# Altium PCB ssd1963.PcbDoc
Units mm, origin at the board's own origin, x right, y up, seen from the top; angles counter-clockwise.
Board outline 75.65 x 56.28 mm, 2 copper layers (Top Layer, Bottom Layer); 41 components, 75 nets, 308 pads, 215 vias.
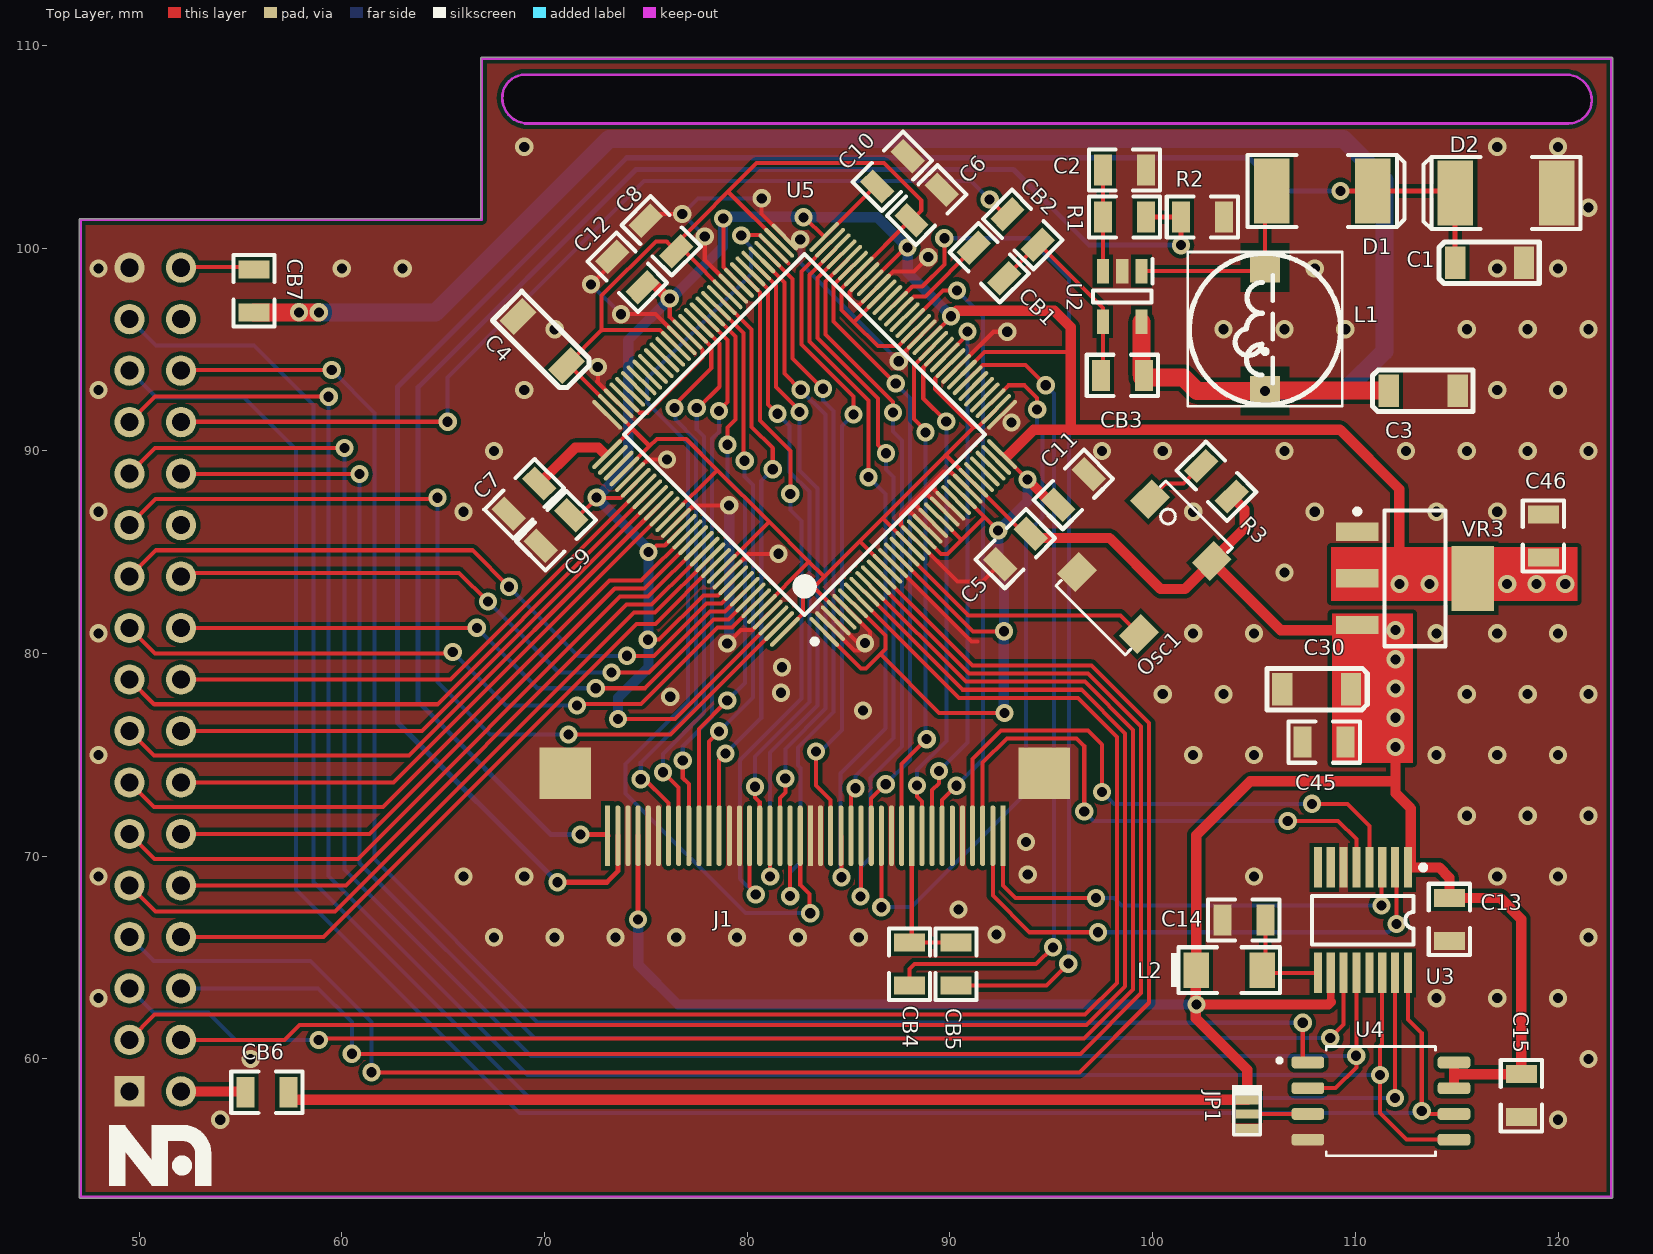
[diagram p0: Top Layer view]
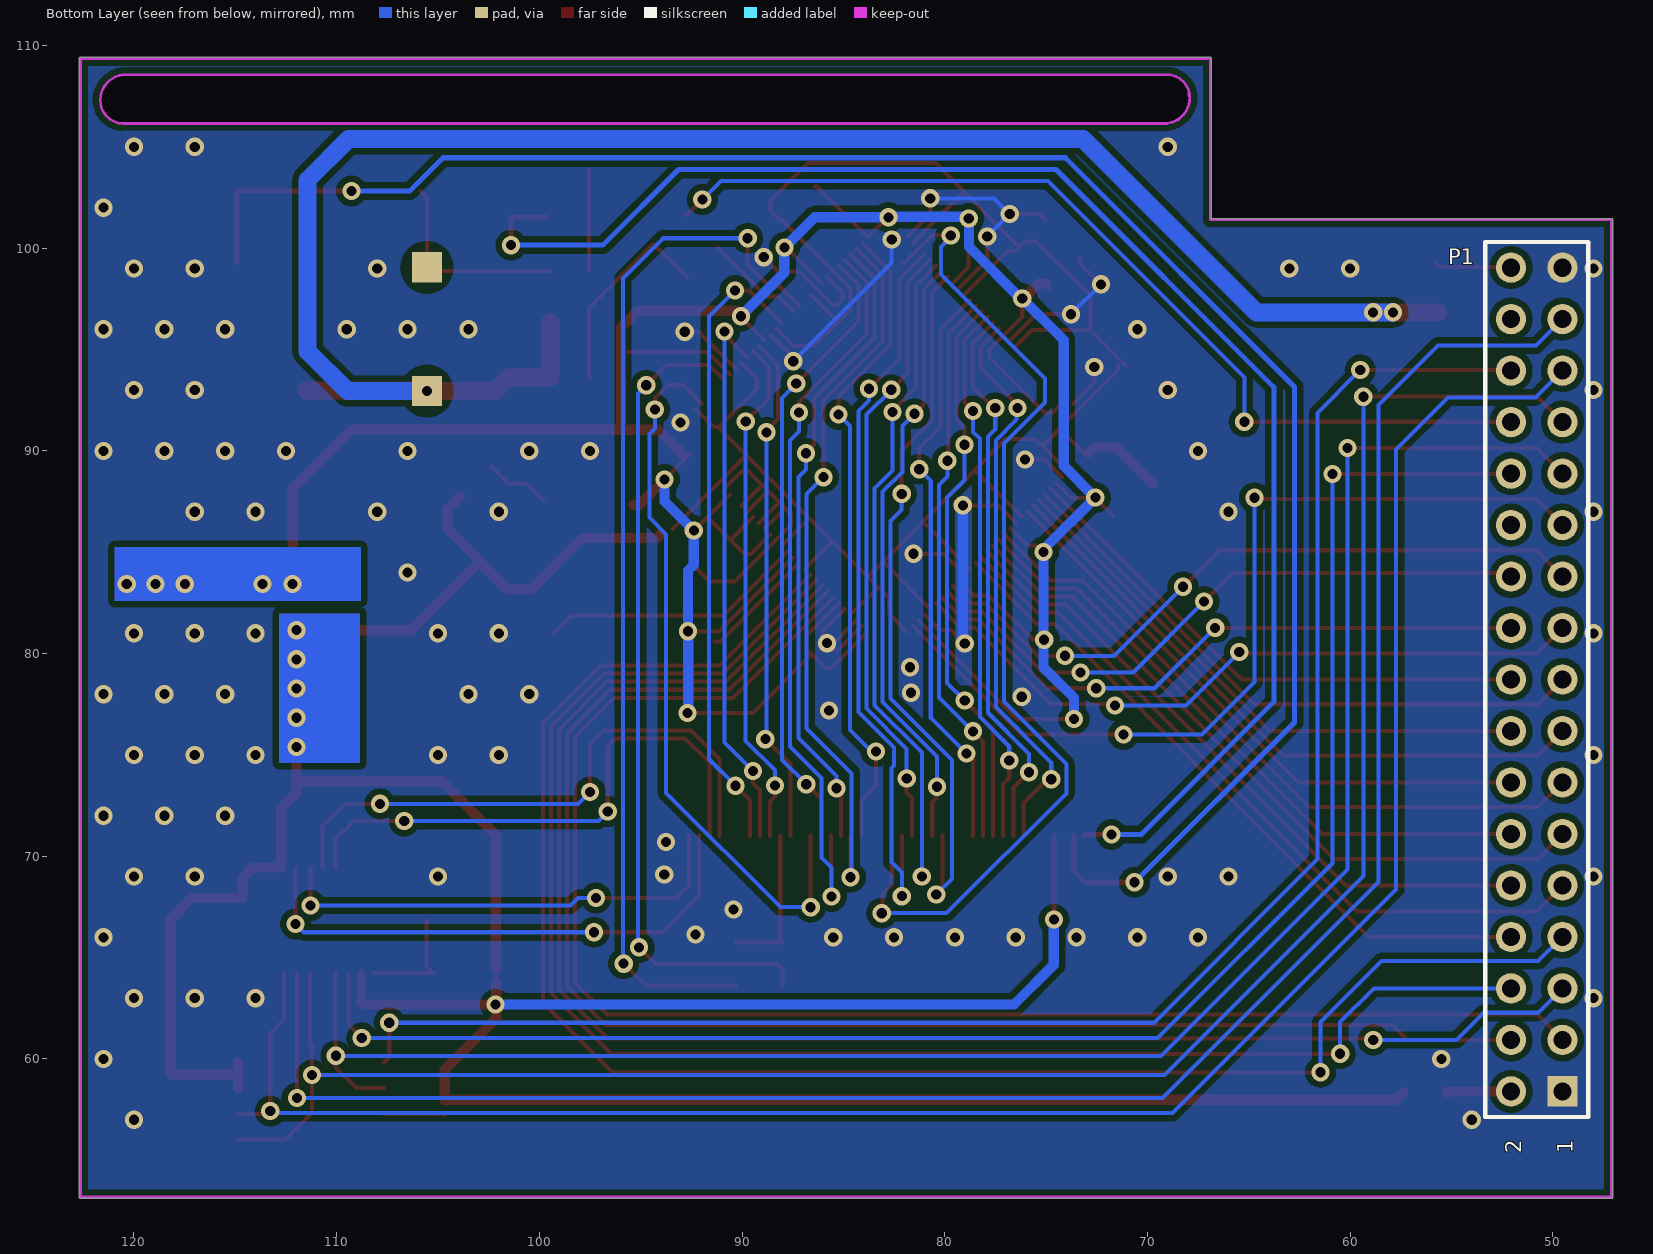
[diagram p1: Bottom Layer view, seen from below]
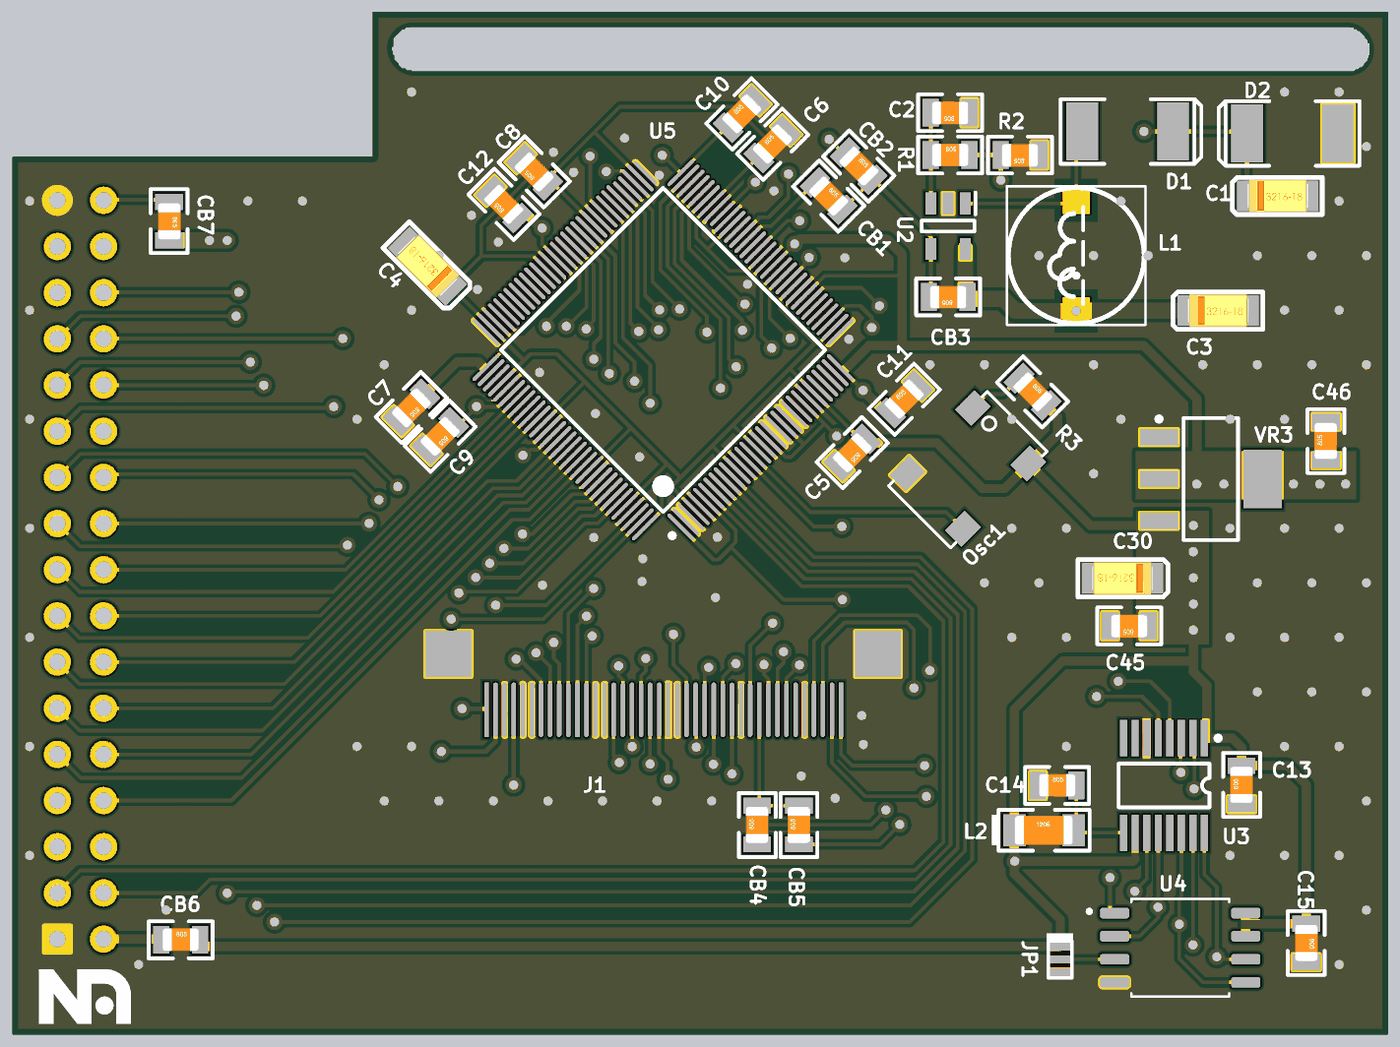
[diagram p2: 3D render of the assembled board from above, using the file's embedded part models]

## Layer stack, top to bottom
Top Solder: solder mask 0.0102, Solder Resist, Dk 3.5
Top Layer: signal copper 0.0356
Dielectric1: dielectric 0.32, FR-4, Dk 4.8
Bottom Layer: signal copper 0.0356
Bottom Solder: solder mask 0.0102, Solder Resist, Dk 3.5

## Board outline
47.116,53.136 cw(c47.111,53.199) 47.047,53.199 47.047,101.401 cw(c47.111,101.401) 47.124,101.464 cw(c47.136,101.401) 47.136,101.465 66.848,101.465 66.848,109.35 cw(c66.912,109.35) 66.848,109.352 cw(c66.912,109.354) 66.912,109.418 122.633,109.418 cw(c122.633,109.354) 122.697,109.354 122.697,53.199 cw(c122.633,53.199) 122.633,53.136 47.121,53.136 cw(c47.121,53.199)
cut-out: 67.946,107.455 67.998,107.506 67.998,107.934 68.237,108.173 68.237,108.208 68.271,108.208 68.494,108.43 68.584,108.43 68.699,108.544 68.879,108.544 68.901,108.566 120.553,108.566 120.568,108.551 120.742,108.551 120.836,108.457 120.946,108.457 121.032,108.37 121.097,108.37 121.25,108.217 121.272,108.217 121.272,108.203 121.424,108.05 121.424,107.999 121.562,107.862 121.562,107.709 121.642,107.629 121.642,107.528 121.685,107.484 121.678,107.477 121.678,107.179 121.671,107.172 121.671,107.049 121.62,106.998 121.62,106.889 121.569,106.838 121.569,106.766 121.489,106.686 121.489,106.664 121.381,106.555 121.381,106.519 121.228,106.367 121.141,106.367 121.025,106.251 120.916,106.251 120.807,106.142 120.619,106.142 120.611,106.134 120.604,106.142 69.031,106.142 68.972,106.201 68.718,106.201 68.623,106.296 68.484,106.296 68.293,106.488 68.283,106.488 68.283,106.562 68.038,106.806 68.038,106.998 67.964,107.072 67.964,107.232 67.911,107.285 67.911,107.508

## Design rules (kind name [scope] priority, off if disabled: settings)
Clearance [All] p1: gap=0.196 ignorepadtopadclearanceinfootprint=FALSE except(0: Arc-Hole Track-Hole SMDPad-Hole THPad-Hole Via-Hole Fill-Hole Poly-Hole Region-Hole Text-Hole)
ComponentClearance [All] p1: gap=0 collisioncheckmode=3 verticalgap=0 showdistances=FALSE
PolygonConnect [All] p1: connectstyle=Direct reliefconductorwidth=0.254 reliefentries=4 polygonreliefangle="90 Angle" airgapwidth=0.254
RoutingVias [All] p1: holewidth=0.5 width=0.9 viastyle="Through Hole" minholewidth=0.5 minwidth=0.9 maxholewidth=0.5 maxwidth=0.9
SolderMaskExpansion [All] p1: expansion=0.102 istentingtop=FALSE
Width [All] p1: maxlimit=100 minlimit=0.2 preferedwidth=0.2 minimp=50.000000 maximp=50.000000 favimp=50.000000
29 further rules are at their usual default settings.

## Components (designator, comment, footprint, x,y, rotation, side; value= is the part's Value field where it differs from the comment)
C1 "10uF/50V" "Tantalium Size A" 116.625,99.283 r0 top
C2 "200pF" 0805 98.611,103.86 r180 top
C3 "10uF" "Tantalium Size A" 113.353,92.972 r0 top
C4 "10uF" "Tantalium Size A" 69.884,95.42 r135 top
C5 "100nF" 0805 93.229,85.166 r225 top
C6 "100nF" 0805 88.855,102.129 r45 top
C7 "100nF" 0805 68.99,87.643 r225 top
C8 "100nF" 0805 75.75,100.608 r135 top
C9 "10nF" 0805 70.566,86.066 r225 top
C10 "10nF" 0805 87.161,103.794 r45 top
C11 "10nF" 0805 96.091,88.098 r45 top
C12 "10nF" 0805 74.082,98.82 r135 top
C13 "100nF" 0805 114.64,66.884 r90 top
C14 "100nF" 0805 104.498,66.854 r0 top
C15 "100nF" 0805 118.188,58.191 r270 top
C30 "10uF" "Tantalium Size A" 108.089,78.247 r180 top
C45 "100nF" 0805 108.463,75.629 r180 top
C46 "100nF" 0805 119.277,85.801 r90 top
CB1 "JUMPER" 0805 91.933,99.275 r315 top
CB2 "JUMPER" 0805 93.588,100.923 r315 top
CB3 "JUMPER" 0805 98.506,93.726 r180 top
CB4 "JUMPER" 0805 88.007,64.676 r90 top
CB5 "JUMPER" 0805 90.299,64.676 r90 top
CB6 "JUMPER" 0805 56.305,58.358 r0 top
CB7 "JUMPER" 0805 55.67,97.896 r270 top
D1 "SS14" 1N4004SMD 108.368,102.825 r270 top
D2 "ZENER 28V" 1N4004SMD 117.435,102.722 r90 top
J1 "CL586-0527-7" FPC_40PIN 92.616,71.015 r180 top locked (schematic designator LCD1)
JP1 "Jumper" JT3 104.669,57.307 r270 top
L1 "10uH 500mA" "INDUCT100UH B" 105.621,96.228 r270 top
L2 "100mh" 1206 103.775,64.389 r0 top
Osc1 "OSILATOR" XTAL_5X7 99.862,87.618 r315 top
P1 "LCD" HDR2X17 49.524,58.401 r90 bottom locked
R1 "1K" 0805 98.611,101.534 r0 top
R2 "80" 0805 102.456,101.534 r180 top
R3 "10K" 0805 103.148,88.503 r315 top
U2 "TPS61040" TPS61040 98.478,97.647 r270 top
U3 "ADS7843E" DBQ016 110.372,66.85 r180 top
U4 "W25Q16JVSSIQ" SOIC127P790X216-8N 111.263,57.925 r0 top
U5 "SSD1963" TSQFP40P1600X1600-128N 82.349,90.241 r135 top locked
VR3 "ASM1117(1.2)" ASM1117 112.945,83.711 r270 top

## Footprints (in the part's own frame and the unit in brackets; to place one, negate y for a bottom-side part, rotate by r counter-clockwise, add the part's x,y. Pads: shape width x height; smd on the part's side, far side on the other; paste and mask are expansions set on the pad)
1N4004SMD [mm]
  rect 3.2x1.75 smd mask+0.102: 1(0,-2.5) 2(0,2.5)
  silkscreen extent -1.78,-3.68 1.78,4.06, body extent -1.57,-2.57 1.54,2.73, height 1.2
0805 [mil]
  rect 35x60 smd mask+4: 1(-41.75,0) 2(41.75,0)
  silkscreen extent -69,-40 69,40, body extent -39,-24 40,25, height 31
1206 [mm]
  rect 1.25x1.75 smd mask+0.102: 1(-1.625,0) 2(1.625,0)
  silkscreen extent -2.87,-1.13 2.5,1.12, body extent -1.62,-0.79 1.58,0.81, height 0.98
ASM1117 [mm]
  rect 0.9x2.1 smd: 1(-2.3,-2.85) 2(0,-2.85) 3(2.3,-2.85)
  rect 3.2x2.1 smd: 4(0,2.85)
  silkscreen extent -3.42,-2.97 3.35,1.5
DBQ016 [mm] "SSOP; 16 Leads; Body Width 3.9 mm; Pitch 0.635 mm"
  rect 0.4x2 smd: 1(-2.222,-2.6) 2(-1.587,-2.6) 3(-0.952,-2.6) 4(-0.317,-2.6) 5(0.318,-2.6) 6(0.953,-2.6) 7(1.588,-2.6) 8(2.223,-2.6) 9(2.222,2.6) 10(1.587,2.6) 11(0.952,2.6) 12(0.317,2.6) 13(-0.318,2.6) 14(-0.953,2.6) 15(-1.588,2.6) 16(-2.223,2.6)
  silkscreen extent -3.1,-2.72 2.5,1.2
FPC_40PIN [mm]
  rect 0.25x3 smd: 1(19.5,0) 11(14.5,0) 21(9.5,0) 31(4.5,0) 40(0,0)
  oval 0.25x3 smd: 2(19,0) 3(18.5,0) 4(18,0) 5(17.5,0) 6(17,0) 7(16.5,0) 8(16,0) 9(15.5,0) 10(15,0) 12(14,0) 13(13.5,0) 14(13,0) 15(12.5,0) 16(12,0) 17(11.5,0) 18(11,0) 19(10.5,0) 20(10,0) 22(9,0) 23(8.5,0) 24(8,0) 25(7.5,0) 26(7,0) 27(6.5,0) 28(6,0) 29(5.5,0) 30(5,0) 32(4,0) 33(3.5,0) 34(3,0) 35(2.5,0) 36(2,0) 37(1.5,0) 38(1,0) 39(0.5,0)
  rect 2.54x2.54 smd: 41(-2.032,-3.073) 42(21.59,-3.073)
HDR2X17 [mm] "Connector; Header; 17x2 Position"
  rect 1.5x1.5 hole 0.9: 1(0,0)
  round 1.5 hole 0.9: 2(0,2.54) 3(2.54,0) 4(2.54,2.54) 5(5.08,0) 6(5.08,2.54) 7(7.62,0) 8(7.62,2.54) 9(10.16,0) 10(10.16,2.54) 11(12.7,0) 12(12.7,2.54) 13(15.24,0) 14(15.24,2.54) 15(17.78,0) 16(17.78,2.54) 17(20.32,0) 18(20.32,2.54) 19(22.86,0) 20(22.86,2.54) 21(25.4,0) 22(25.4,2.54) 23(27.94,0) 24(27.94,2.54) 25(30.48,0) 26(30.48,2.54) 27(33.02,0) 28(33.02,2.54) 29(35.56,0) 30(35.56,2.54) 31(38.1,0) 32(38.1,2.54) 33(40.64,0) 34(40.64,2.54)
  silkscreen extent -1.27,-1.27 41.91,3.81
"INDUCT100UH B" [mm]
  rect 1.5x1.5 all layers, no hole: 1(3.274,-0.076) 2(-2.822,-0.076)
  silkscreen extent -3.58,-3.89 4.04,3.73, body extent -3.48,-3.77 3.94,3.59, height 4.25
JT3 [mil]
  rect 18x45 smd mask+4: 1(-27,0) 2(1,0) 3(29,0)
  silkscreen extent -55,-30 41,28
SOIC127P790X216-8N [mm]
  rrect50% 1.61x0.58 smd: 1(-3.605,1.905) 2(-3.605,0.635) 3(-3.605,-0.635) 4(-3.605,-1.905) 5(3.605,-1.905) 6(3.605,-0.635) 7(3.605,0.635) 8(3.605,1.905)
  silkscreen extent -5.1,-2.69 2.69,2.69
"Tantalium Size A" [mm]
  rect 1x1.6 smd paste+0.038 mask+0.038: 1(-1.7,0) 2(1.7,0)
  silkscreen extent -2.5,-1.02 2.45,1.02, body extent -1.7,-0.9 1.7,0.9, height 1.8
TPS61040 [mm]
  rect 1.2x0.6 smd: 1(-1.222,0.97) 2(-1.222,0.02) 3(-1.222,-0.93) 4(1.278,-0.93) 5(1.278,0.97)
  silkscreen extent -1.82,-1.43 0.33,1.52, body extent -1.37,-1.43 1.43,1.47, height 1.45
TSQFP40P1600X1600-128N [mil]
  oval 78.74x8 smd: 1(-295.7,214.85) 2(-295.7,199.1) 3(-295.7,183.35) 4(-295.7,167.6) 5(-295.7,151.86) 6(-295.7,136.11) 7(-295.7,120.36) 8(-295.7,104.61) 9(-295.7,88.86) 10(-295.7,73.12) 11(-295.7,57.37) 12(-295.7,41.62) 13(-295.7,25.87) 14(-295.7,10.12) 15(-295.7,-5.62) 16(-295.7,-21.37) 17(-295.7,-37.12) 18(-295.7,-52.87) 19(-295.7,-68.62) 20(-295.7,-84.36) 21(-295.7,-100.11) 22(-295.7,-115.86) 23(-295.7,-131.61) 24(-295.7,-147.36) 25(-295.7,-163.1) 26(-295.7,-178.85) 27(-295.7,-194.6) 28(-295.7,-210.35) 29(-295.7,-226.1) 30(-295.7,-241.84) 31(-295.7,-257.59) 32(-295.7,-273.34) 66(300.76,-257.59) 67(300.76,-241.84) 70(300.76,-194.6) 71(300.76,-178.85) 72(300.76,-163.1) 73(300.76,-147.36) 74(300.76,-131.61) 75(300.76,-115.86) 76(300.76,-100.11) 77(300.76,-84.36) 78(300.76,-68.62) 79(300.76,-52.87) 80(300.76,-37.12) 81(300.76,-21.37) 82(300.76,-5.62) 83(300.76,10.12) 84(300.76,25.87) 85(300.76,41.62) 86(300.76,57.37) 87(300.76,73.12) 88(300.76,88.86) 89(300.76,104.61) 90(300.76,120.36) 91(300.76,136.11) 92(300.76,151.86) 93(300.76,167.6) 94(300.76,183.35) 95(300.76,199.1) 96(300.76,214.85)
  oval 8x78.74 smd: 33(-241.56,-327.47) 34(-225.81,-327.47) 35(-210.07,-327.47) 36(-194.32,-327.47) 37(-178.57,-327.47) 37(-162.82,-327.47) 39(-147.07,-327.47) 40(-131.33,-327.47) 41(-115.58,-327.47) 42(-99.83,-327.47) 43(-84.08,-327.47) 44(-68.33,-327.47) 45(-52.59,-327.47) 46(-36.84,-327.47) 47(-21.09,-327.47) 48(-5.34,-327.47) 49(10.41,-327.47) 50(26.15,-327.47) 51(41.9,-327.47) 52(57.65,-327.47) 53(73.4,-327.47) 54(89.14,-327.47) 55(104.89,-327.47) 57(136.39,-327.47) 58(152.14,-327.47) 59(167.89,-327.47) 60(183.63,-327.47) 61(199.38,-327.47) 62(215.13,-327.47) 63(230.88,-327.47) 64(246.63,-327.47) 97(246.63,268.98) 98(230.88,268.98) 99(215.13,268.98) 100(199.38,268.98) 101(183.63,268.98) 102(167.89,268.98) 103(152.14,268.98) 104(136.39,268.98) 105(120.64,268.98) 106(104.89,268.98) 107(89.14,268.98) 108(73.4,268.98) 109(57.65,268.98) 110(41.9,268.98) 111(26.15,268.98) 112(10.41,268.98) 113(-5.34,268.98) 114(-21.09,268.98) 115(-36.84,268.98) 116(-52.59,268.98) 117(-68.33,268.98) 118(-84.08,268.98) 119(-99.83,268.98) 120(-115.58,268.98) 121(-131.33,268.98) 122(-147.07,268.98) 123(-162.82,268.98) 124(-178.57,268.98) 125(-194.32,268.98) 126(-210.07,268.98) 127(-225.81,268.98) 128(-241.56,268.98)
  oval 8x70 smd: 56(120.64,-327.47)
  oval 70x8 smd: 65(300.76,-273.34) 68(300.76,-226.1) 69(300.76,-210.35)
  silkscreen extent -301,-277 251,246, body extent -273,-305 278,246, height 63
XTAL_5X7 [mil]
  rect 50x60 smd: 1(0,0) 2(0,-200) 3(170,-200) 4(170,0)
  silkscreen extent -10,-248 180,47

## Part data
C1 C3 C4 C30: library part "Cap Pol1", "Polarized Capacitor (Radial)"
C2: library part "Cap Semi", "Capacitor (Semiconductor SIM Model)"
C5 C6 C7 C8 C9 C10 C11 C12 C13 C14 C15 C45 C46: library part Cap, "Capacitor"
CB1 CB2 CB3 CB4 CB5 CB6 CB7: library part "Circuit Breaker", "Circuit Breaker"
D1 D2: library part "D Schottky", "Schottky Diode"
J1: "FH12 Series, \"Flip-Lock\" SMT/ZIF FFC/FPC Connector - 0.5mm Spaced Bottom Contact"
JP1: library part "Jumper Selector", "Jumper Selector"
L1 L2: library part Inductor, "Inductor"
P1: library part "Header 17X2", "Header, 17-Pin, Dual row"
R1 R2: library part Res1, "Resistor"
R3: library part Res3, "Resistor"
U2: "Backlight Regulagtor"
U3: "4-Wire Touch Screen Controller, 16-Pin SSOP, Pb-Free"
U4: "FLASH - NOR Memory IC 16Mb _2M x 8_ SPI - Quad I/O 133MHz 8-SOIC"
VR3: library part "Volt Reg_1", "Voltage Regulator"

## Via types
v1: diameter 0.9, hole 0.5, Top Layer to Bottom Layer, tented both sides, 215 vias

## Nets (pads, with @x,y where several pads share a name; then routed paths per layer and width w, separated by ;. In a path a pad name is that pad's centre, name@x,y a point inside that pad or via, vN(x,y) a via of type N, cw(c..) or ccw(c..) an arc to the next point about the centre after c; other vN are vias at no path point)
"10 MHZ": Osc1.3 U5.15 | length 13.2
  Top Layer w0.2: U5.15 90.904,81.888 98.408,81.888 Osc1.3
+1.2: C9.1 C10.1 C11.1 C12.1 C46.1 U5.1 U5.6 U5.14 U5.18 U5.21 U5.25 U5.32 U5.40 U5.46 U5.56 U5.64 U5.73 U5.82 U5.93 U5.102 U5.110 U5.119 U5.126 VR3.2 VR3.4 | length 175.9
  Top Layer w0.2: C9.1@71.679,86.778 v1@72.539,87.637 ; v1@72.57,87.675 73.75,87.675 74.5,88.425 U5.102 ; v1(73.623,76.771) 76.425,76.771 U5.126 ; U5.93 74.687,91.883 75.077,91.883 77.799,94.604 77.799,94.99 77.049,95.741 U5.82 76.178,96.615 v1(76.178,97.513) ; C12.1@74.832,97.964 C12.1 ; v1(75.096,80.685) 75.651,80.685 77.833,82.867 78.558,82.867 78.674,82.984 U5.119@78.674,82.981 ; v1(75.124,85.017) 75.217,85.017 75.527,85.327 75.93,85.327 U5.110 ; U5.119@78.675,82.981 U5.119 ; v1(78.818,101.469) 78.818,99.066 U5.73 ; v1(82.78,101.522) 82.832,101.522 U5.64 86.293,103.044 C10.1 ; U5.1 85.605,79.268 85.862,79.268 86.565,79.972 ; U5.6 86.816,80.885 86.816,80.235 86.565,79.984 86.565,79.972 ; U5.56 87.814,100.04 v1(87.902,100.04) ; U5.14 91.127,81.1 v1(92.665,81.1) ; U5.18 89.569,84.921 89.89,84.921 90.578,85.609 ; U5.46 v1@90.172,96.74 ; U5.21 90.578,85.609 ; U5.25 91.709,86.74 ; U5.40 91.711,94.885 95.948,94.885 95.96,94.873 ; v1(92.378,86.071) 91.709,86.74 ; U5.32@92.573,89.84 v1(93.825,88.588) ; v1(92.691,77.073) 89.464,77.073 86.565,79.972 ; 90.578,85.609 91.709,86.74
  Top Layer w0.508: C12.1@75.024,98.263 75.36,98.263 76.11,97.513 v1(76.178,97.513) ; v1(90.058,96.641) 90.328,96.912 95.143,96.912 95.96,96.095 95.96,94.873 95.96,91.047 ; 92.859,89.768 94.138,91.047 95.96,91.047 ; v1(93.825,88.588) 95.065,87.348 C11.1 ; v1(112.173,83.432) 112.173,88.12 109.246,91.047 95.96,91.047
  Bottom Layer w0.508: v1(73.623,76.771) 73.623,77.823 75.131,79.331 75.124,79.338 v1(75.124,85.017) 75.124,85.127 75.131,85.134 v1(72.57,87.696) 74.137,89.262 74.137,95.472 v1(76.178,97.513) 76.249,97.513 78.805,100.069 78.805,101.456 v1(78.818,101.469) 78.798,101.469 78.88,101.551 82.75,101.551 v1(82.78,101.522) 86.42,101.522 v1(87.902,100.04) 87.915,100.04 87.915,98.785 v1(90.058,96.641) ; v1(92.691,77.073) 92.666,77.073 92.61,77.017 92.653,76.974 92.653,81.088 v1(92.665,81.1) 92.665,84.098 92.666,84.099 92.378,84.388 v1(92.378,86.071) 93.825,87.517 v1(93.825,88.588)
  other v1: 113.664,83.432 117.489,83.432 118.942,83.432 120.357,83.432
+3.3: C4.1 C5.1 C6.1 C7.1 C8.1 C13.2 C15.1 C30.1 C45.1 CB6.2 J1.4 JP1.1 L2.1 Osc1.4 R3.2 U3.1 U3.10 U4.7 U4.8 U5.4 U5.12 U5.16 U5.27 U5.34 U5.42 U5.48 U5.54 U5.58 U5.66 U5.75 U5.84 U5.95 U5.97 U5.100 U5.108 U5.117 U5.124 U5.128 VR3.3 | length 277.7
  Top Layer w0.2: C4.1 72.82,95.953 72.82,95.974 ; C4.1@71.458,94.218 71.458,93.98 U5.95 75.154,90.285 75.154,90.241 ; U5.97 74.322,91.073 75.154,90.241 ; U5.100 75.154,90.208 ; U5.108 78.514,89.043 78.514,89.068 ; U5.84 75.687,95.974 72.82,95.974 ; U5.117 81.066,86.503 81.066,86.516 ; U5.75 76.895,99.858 C8.1 C8.1@76.34,100.017 ; 79.112,102.731 U5.66 ; U5.124 83.034,84.511 83.034,84.548 ; U5.128 82.761,81.976 82.761,82.761 83.269,83.269 ; U5.4 83.301,83.269 83.269,83.269 ; U5.54 85.275,96.369 85.275,96.341 ; 86.712,86.646 U5.16 ; U5.12 85.562,85.533 85.533,85.533 ; U5.48 87.47,95.169 86.446,95.169 85.275,96.341 ; 89.793,89.787 U5.27 C5.1@93.424,86.157 ; U5.42 90.024,94.326 89.274,93.576 89.274,93.055 91.164,91.164 85.533,85.533 ; 91.173,91.173 91.393,91.173 U5.34 ; 72.82,95.974 72.82,97.658 75.492,100.329 76.028,100.329 C8.1@76.34,100.017 ; 75.154,90.208 75.154,90.241 ; 75.154,90.208 75.538,90.591 76.99,90.591 78.514,89.068 ; C8.1@76.34,100.017 76.34,100.071 80.462,104.193 86.736,104.193 88.586,102.344 88.586,101.859 C6.1 88.019,101.379 85.502,98.862 85.502,98.855 U5.58 84.654,98.011 84.654,96.962 85.275,96.341 ; 78.514,89.068 81.066,86.516 ; 81.066,86.516 83.034,84.548 ; 83.034,84.548 83.764,83.817 83.764,83.764 ; 83.269,83.269 83.764,83.764 ; 83.764,83.764 85.533,85.533
  Top Layer w0.254: v1(74.616,66.878) J1.4
  Top Layer w0.381: 108.785,62.811 U3.10
  Top Layer w0.508: CB6.2 57.73,57.993 JP1.1 ; C7.1 71.511,90.164 72.66,90.164 72.929,89.895 ; C5.1 94.191,85.704 97.874,85.704 100.395,83.183 101.593,83.183 102.915,84.505 Osc1.4 ; L2.1@102.132,63.823 v1@102.132,62.655 ; L2.1 102.15,71.048 104.809,73.706 111.818,73.706 111.986,73.538 ; R3.2 104.533,87.118 104.533,86.182 Osc1.4 ; JP1.1@104.669,58.169 104.669,59.463 102.132,62 v1@102.132,62.655 ; 108.785,62.811 108.661,62.687 v1(102.164,62.687) v1@102.132,62.655 ; VR3.3@109.247,81.156 106.324,81.156 Osc1.4 ; v1(111.986,75.395) 111.986,73.538 ; U4.7 U4.8 ; 114.914,59.251 C15.1 118.188,66.9 117.143,67.944 C13.2 114.64,68.951 114.142,69.45 112.728,69.45 112.728,72.361 111.986,73.103 111.986,73.538
  Bottom Layer w0.508: v1(74.616,66.878) 74.616,64.656 76.585,62.687 v1(102.164,62.687)
  other v1: 111.986,76.835 111.986,78.276 111.986,79.716 111.986,81.156
+5: C3.1 CB3.1 CB7.2 L1.1 U2.5 | length 91.2
  Top Layer w0.889: CB7.2 v1(58.864,96.836) ; CB3.1@99.448,93.793 U2.5 ; CB3.1@99.465,93.619 101.527,93.619 102.191,92.955 v1(105.545,92.955) 105.562,92.973 C3.1@111.501,92.973
  Bottom Layer w0.889: v1(57.885,96.836) 64.622,96.835 73.173,105.386 109.419,105.386 111.429,103.376 111.429,94.912 109.472,92.955 v1(105.545,92.955)
ALE: P1.24
B2_TFT: J1.23 U5.63 | length 32.1
  Top Layer w0.2: v1(83.398,75.167) 83.398,73.498 84.116,72.779 J1.23 ; U5.63 82.674,98.859 82.674,95.242 85.241,92.676 v1(85.241,91.791)
  Bottom Layer w0.2: v1(83.398,75.167) 83.62,75.167 84.679,76.227 84.679,91.23 v1(85.241,91.791)
B3_TFT: J1.24 U5.62 | length 36.1
  Top Layer w0.2: U5.62 83.07,98.69 83.07,95.406 85.987,92.49 v1(85.987,88.705) ; J1.24 84.65,70.981 v1(84.65,68.963)
  Bottom Layer w0.2: v1(84.65,68.963) 84.592,69.021 84.592,74.096 86.812,76.316 86.812,87.881 v1(85.987,88.705)
B4_TFT: J1.25 U5.61 | length 31.6
  Top Layer w0.2: U5.61 83.466,98.52 83.466,95.57 86.449,92.587 86.449,90.298 86.845,89.902 v1(86.845,89.884) ; J1.25 85.116,73.132 v1(85.338,73.354)
  Bottom Layer w0.2: v1(85.338,73.354) 85.338,73.958 87.208,75.828 87.208,88.714 86.845,89.077 v1(86.845,89.884)
B5_TFT: J1.26 U5.60 | length 37.3
  Top Layer w0.2: U5.60 83.862,98.35 83.862,95.734 87.195,92.401 v1(87.195,91.891) ; v1(85.593,68.016) 85.616,68.039 J1.26
  Bottom Layer w0.2: v1(85.593,68.016) 85.593,69.443 86.084,69.934 86.084,73.866 87.637,75.419 87.637,90.51 87.195,90.952 v1(87.195,91.891)
B6_TFT: J1.27 U5.59 | length 30.9
  Top Layer w0.2: U5.59 84.258,98.181 84.258,96.384 87.338,93.305 87.347,93.305 v1(87.324,93.327) ; J1.27 86.116,72.844 v1(86.83,73.557)
  Bottom Layer w0.2: v1(86.83,73.557) 88.033,74.76 88.033,92.618 v1(87.324,93.327)
B7_TFT: J1.28 U5.35 | length 35.8
  Top Layer w0.2: v1(86.616,67.489) J1.28 ; U5.35 92.892,93.238 93.672,93.238 94.304,92.607 v1(94.304,92.038)
  Bottom Layer w0.2: v1(86.616,67.489) 88.106,67.489 93.744,73.127 93.744,85.878 94.571,86.704 94.571,90.836 94.304,91.103 v1(94.304,92.038)
D0: P1.3 U5.7 | length 77.6
  Top Layer w0.2: P1.3 50.768,62.185 96.669,62.185 98.242,63.758 98.242,75.895 96.321,77.817 93.003,77.817 93,77.819 92.382,77.819 92.38,77.817 90.45,77.817 U5.7
D1: P1.4 U5.8 | length 75.9
  Top Layer w0.2: P1.4 57.174,60.941 57.912,61.679 96.729,61.679 98.638,63.588 98.638,76.065 96.487,78.217 90.616,78.217 U5.8
D2: P1.5 U5.9 | length 80.3
  Top Layer w0.2: v1(58.861,60.933) 58.929,61.002 96.618,61.002 99.034,63.418 99.034,76.234 96.652,78.617 90.782,78.617 U5.9
  Bottom Layer w0.2: P1.5 50.725,62.28 53.412,62.28 54.759,60.933 v1(58.861,60.933)
D3: P1.6 U5.10 | length 80.1
  Top Layer w0.2: v1(60.493,60.256) 96.437,60.256 99.43,63.249 99.43,76.404 96.818,79.016 90.947,79.016 U5.10
  Bottom Layer w0.2: P1.6 58.83,63.481 60.493,61.818 v1(60.493,60.256)
D4: P1.7 U5.11 | length 86
  Top Layer w0.2: v1(61.464,59.343) 96.395,59.343 99.826,62.774 99.826,76.574 96.984,79.416 91.113,79.416 U5.11
  Bottom Layer w0.2: P1.7 50.721,64.824 58.454,64.824 61.464,61.814 v1(61.464,59.343)
D5: P1.8 U5.116 | length 34
  Top Layer w0.2: P1.8 59.09,66.021 74.538,81.468 75.465,81.468 U5.116
D6: P1.9 U5.115 | length 36.4
  Top Layer w0.2: P1.9 50.812,67.273 59.667,67.273 74.412,82.018 75.449,82.018 U5.115
D7: P1.10 U5.114 | length 32.7
  Top Layer w0.2: P1.10 60.195,68.561 74.047,82.414 75.274,82.414 77.141,84.281 77.147,84.281 U5.114
D8: P1.11 U5.113 | length 35
  Top Layer w0.2: P1.11 50.752,69.874 60.794,69.874 73.731,82.81 75.11,82.81 U5.113
D9: P1.12 U5.112 | length 31.3
  Top Layer w0.2: P1.12 61.359,71.101 73.464,83.206 74.937,83.206 77.328,85.597 U5.112
D10: P1.13 U5.111 | length 33.6
  Top Layer w0.2: P1.13 50.733,72.432 62.027,72.432 73.197,83.602 74.77,83.602 U5.111
D11: P1.14 U5.107 | length 29.4
  Top Layer w0.2: P1.14 62.547,73.641 U5.107
D12: P1.15 U5.106 | length 31.7
  Top Layer w0.2: P1.15 50.732,74.973 63.313,74.973 U5.106
D13: P1.16 U5.105 | length 28
  Top Layer w0.2: P1.16 63.959,76.181 75.351,87.574 U5.105
D14: P1.17 U5.104 | length 30.3
  Top Layer w0.2: P1.17 50.745,77.5 64.709,77.5 73.16,85.951 73.16,85.957 74.309,87.105 74.314,87.105 U5.104
D15: P1.18 U5.103 | length 26.6
  Top Layer w0.2: P1.18 65.364,78.721 U5.103
DCLK: J1.30 U5.45 | length 25.4
  Top Layer w0.2: J1.30 87.616,74.542 v1(88.852,75.778) ; v1(88.799,90.916) 88.839,90.956 88.222,91.573 88.222,94.225 U5.45
  Bottom Layer w0.2: v1(88.799,90.916) 88.799,75.831 v1(88.852,75.778)
DEN: J1.34 U5.49 | length 31.2
  Top Layer w0.2: U5.49 89.651,97.917 v1(90.343,97.917) ; J1.34 89.616,72.771 v1(90.326,73.481)
  Bottom Layer w0.2: v1(90.326,73.481) 91.632,74.787 91.632,96.627 v1(90.343,97.917)
DISP: CB4.2 CB5.2 J1.31 | length 7.6
  Top Layer w0.2: J1.31 88.116,65.845 CB4.2 CB5.2
F_CS: P1.30 U4.1 | length 83.6
  Top Layer w0.2: P1.30@52.091,93.988 v1(59.504,93.988) ; v1(107.406,61.787) 107.406,60.082 U4.1
  Bottom Layer w0.2: v1(59.504,93.988) 61.617,91.876 61.617,69.856 69.686,61.787 v1(107.406,61.787)
G2_TFT: J1.15 U5.72 | length 36.4
  Top Layer w0.2: U5.72 80.627,97.822 80.627,91.49 82.123,89.994 v1(82.123,87.882) ; J1.15 80.116,68.516 80.523,68.11 v1(80.421,68.11)
  Bottom Layer w0.2: v1(80.421,68.11) 79.639,68.891 79.639,74.721 79.677,74.759 79.677,74.782 82.671,77.776 82.671,86.541 82.123,87.089 v1(82.123,87.882)
G3_TFT: J1.16 U5.71 | length 30.3
  Top Layer w0.2: U5.71 81.023,97.992 81.023,92.295 v1(81.487,91.831) ; v1(80.385,73.431) 80.385,72.9 80.616,72.668 J1.16
  Bottom Layer w0.2: v1(80.385,73.431) 80.385,74.93 83.067,77.612 83.067,87.993 82.091,88.969 82.091,91.227 v1(81.487,91.831)
G4_TFT: J1.17 U5.70 | length 34.4
  Top Layer w0.2: U5.70 81.419,98.162 81.419,93.156 82.583,91.991 v1(82.583,91.92) ; J1.17 81.131,71 v1(81.131,68.997)
  Bottom Layer w0.2: 81.131,73.863 81.131,75.115 83.463,77.448 83.463,88.157 82.583,89.036 v1(82.583,91.92) ; v1(81.131,68.997) 81.131,73.863
G5_TFT: J1.18 U5.69 | length 30.6
  Top Layer w0.2: U5.69 81.845,98.301 81.845,93.809 v1(82.638,93.016) ; J1.18 81.616,72.881 81.877,73.141 v1(81.877,73.842)
  Bottom Layer w0.2: v1(81.877,73.842) 81.877,75.302 83.859,77.284 83.859,91.795 v1(82.638,93.016)
G6_TFT: J1.19 U5.68 | length 37
  Top Layer w0.2: U5.68 82.241,98.471 82.241,94.557 v1(83.735,93.063) ; v1(82.116,68.034) J1.19
  Bottom Layer w0.2: v1(82.116,68.034) 82.116,69.203 82.623,69.71 82.623,74.357 82.498,74.482 82.498,75.362 84.255,77.12 84.255,91.959 83.735,92.48 v1(83.735,93.063)
G7_TFT: J1.20 U5.67 | length 50.8
  Top Layer w0.2: v1@79.429,100.658 80.623,100.658 80.637,100.644 80.637,100.638 80.64,100.638 U5.67 81.291,99.99 82.045,99.237 ; J1.20 82.616,68.589 83.074,68.131 v1@83.074,67.228
  Bottom Layer w0.2: v1@79.587,100.67 80.188,100.069 80.188,98.71 75.048,93.569 75.048,92.391 77.08,90.358 77.08,77.628 74,74.549 74,73.1 79.909,67.192 v1(83.111,67.192)
  other v1: 79.705,100.621
GND: C1.2 C2.1 C3.2 C4.2 C5.2 C6.2 C7.2 C8.2 C9.2 C10.2 C11.2 C12.2 C13.1 C14.1 C15.2 C30.2 C45.2 C46.2 D2.1 J1.3 J1.5 J1.6 J1.13 J1.14 J1.21 J1.22 J1.29 J1.36 J1.41 J1.42 JP1.3 Osc1.2 P1.1 P1.33 R2.1 U2.2 U3.6 U4.4 U5.2 U5.3 U5.5 U5.13 U5.17 U5.19 U5.20 U5.22 U5.23 U5.26 U5.33 U5.41 U5.47 U5.55 U5.57 U5.65 U5.74 U5.83 U5.94 U5.96 U5.101 U5.109 U5.118 U5.125 VR3.1 | length 90.7
  Top Layer w0.2: v1(72.295,98.217) 73.332,99.254 C12.2 ; v1(72.627,94.139) 72.627,93.449 72.591,93.413 U5.94 ; v1(73.768,96.744) 75.482,96.744 U5.83 ; U5.101 75.085,89.573 v1(76.04,89.573) ; C8.2 75.331,101.689 v1(76.796,101.689) ; U5.109 77.352,87.315 v1(79.108,87.315) ; v1(77.905,100.58) 77.905,99.413 U5.74 ; v1(79.017,80.494) 79.692,81.17 80.258,81.17 81.005,81.917 81.005,81.92 U5.125 ; U5.118 80.053,84.924 v1(81.536,84.924) ; v1(80.713,102.459) 80.713,101.696 U5.65 ; v1@82.574,100.449 82.598,100.426 v1(82.618,100.426) ; U5.2 85.291,80.147 85.541,80.147 v1@85.702,80.308 ; U5.3 85.696,80.308 v1@85.702,80.308 ; U5.5 86.054,81.081 86.054,80.66 v1@85.702,80.308 ; U5.57 85.05,97.841 85.05,97.467 85.317,97.2 85.54,97.2 U5.55 87.2,98.86 88.22,98.86 89.035,99.674 v1@89.035,99.816 ; U5.13 91.069,80.592 91.352,80.592 ; v1(87.473,94.423) 87.473,94.353 87.533,94.293 87.533,94.668 U5.47 ; 87.916,87.139 U5.19 ; U5.20 88.173,87.448 88.156,87.448 ; U5.22 88.756,87.996 88.756,88.048 ; U5.23 89.026,88.292 89.026,88.318 ; U5.41 92.138,95.878 v1(92.826,95.878) ; U5.26 90.035,88.98 89.688,88.98 89.026,88.318 ; C5.2 91.61,83.548 90.376,83.548 U5.17 88.327,85.6 87.577,86.35 87.577,86.869 88.156,87.448 ; 88.156,87.448 88.756,88.048 ; 88.756,88.048 89.026,88.318
  Bottom Layer w0.2: v1(72.295,98.217) v1(73.768,96.744) ; v1(77.905,100.58) v1(76.796,101.689) 77.566,102.459 v1(80.713,102.459) ; v1(82.618,100.426) 82.627,100.426 v1@82.873,100.672 ; v1@82.657,100.455 82.598,100.515 82.621,100.538 82.621,99.275 v1(87.473,94.423) v1@87.473,94.341
  Bottom Layer w0.508: v1(79.017,80.494) 79.108,80.586 v1(79.108,87.315)
  other v1: 54,57 120,57 55.5,60 121.5,60 48,63 114,63 117,63 120,63 67.5,66 70.5,66 73.5,66 76.5,66 79.5,66 82.5,66 85.5,66 121.5,66 92.293,66.145 90.425,67.375 48,69 66,69 69,69 105,69 117,69 120,69 93.841,69.106 93.75,70.7 115.5,72 118.5,72 121.5,72 48,75 102,75 105,75 114,75 117,75 120,75 85.708,77.187 76.198,77.87 100.5,78 103.5,78 115.5,78 118.5,78 121.5,78 81.669,78.071 81.715,79.323 85.811,80.514 48,81 102,81 105,81 114,81 117,81 120,81 106.5,84 48,87 66,87 102,87 108,87 114,87 117,87 67.5,90 97.5,90 100.5,90 106.5,90 112.5,90 115.5,90 118.5,90 121.5,90 93.041,91.399 48,93 69,93 117,93 120,93 70.5,96 103.5,96 106.5,96 109.5,96 115.5,96 118.5,96 121.5,96 48,99 60,99 63,99 108,99 117,99 120,99 88.928,99.558 121.5,102 69,105 117,105 120,105
HSYNC: J1.32 U5.44 | length 25.4
  Top Layer w0.2: v1(88.379,73.498) 88.379,72.947 88.616,72.709 J1.32 ; U5.44 88.683,94.12 88.683,92.583 v1(89.82,91.446)
  Bottom Layer w0.2: v1(88.379,73.498) 88.379,74.25 89.82,75.691 v1(89.82,91.446)
LCS: P1.19 U5.123 | length 34.9
  Top Layer w0.2: P1.19 50.777,80.008 65.611,80.008 65.544,80.075 v1(65.471,80.075) ; v1(71.599,77.442) 71.674,77.517 74.763,77.517 78.529,81.283 79.24,81.283 U5.123
  Bottom Layer w0.2: v1(65.471,80.075) 68.104,77.442 v1(71.599,77.442)
LRD: P1.22 U5.121 | length 31.6
  Top Layer w0.2: P1.22 52.246,83.983 65.788,83.983 v1(67.208,82.564) ; v1(73.297,79.071) 75.157,79.071 78.161,82.075 78.901,82.075 U5.121
  Bottom Layer w0.2: v1(67.208,82.564) 70.7,79.071 v1(73.297,79.071)
LRS: P1.20 U5.122 | length 31.2
  Top Layer w0.2: P1.20 66.651,81.261 v1(66.66,81.27) ; v1(72.528,78.291) 74.957,78.291 78.346,81.679 79.07,81.679 U5.122
  Bottom Layer w0.2: v1(66.66,81.27) 69.64,78.291 v1(72.528,78.291)
LWR: P1.21 U5.120 | length 34.2
  Top Layer w0.2: P1.21 50.823,85.1 66.437,85.1 v1(68.243,83.294) ; v1(74.071,79.891) 74.083,79.88 75.406,79.88 77.997,82.471 78.734,82.471 79.591,83.327 79.591,83.334 U5.120
  Bottom Layer w0.2: v1(68.243,83.294) 71.646,79.891 v1(74.071,79.891)
M_CS: P1.32
NetC2_2: C2.2 R1.1 U2.3 | length 5
  Top Layer w0.2: U2.3 97.548,103.858 C2.2
NetC14_2: C14.2 L2.2 U3.9 | length 5.5
  Top Layer w0.2: L2.2@105.198,64.25 U3.9 ; L2.2 105.558,64.547 C14.2
NetCB1_2: CB1.2 CB2.2 CB3.2 U2.4 | length 10.3
  Top Layer w0.2: CB1.2 92.69,98.525 CB2.2 94.418,100.173 97.548,97.043 U2.4 97.548,93.694 CB3.2@97.487,93.633
NetCB4_1: CB4.1 U5.39 | length 40.8
  Top Layer w0.2: CB4.1 88.007,64.429 88.261,64.683 94.255,64.683 v1(95.079,65.507) ; U5.39 90.876,93.481 U5.39@90.876,93.488 ; U5.39@90.872,93.485 U5.39@90.876,93.488 ; v1(94.728,93.238) 93.734,94.231 91.619,94.231 U5.39@90.876,93.488
  Bottom Layer w0.2: v1(94.728,93.238) 95.142,92.824 v1@95.142,65.507
NetCB5_1: CB5.1 U5.52 | length 51.2
  Top Layer w0.2: U5.52 87.199,97.158 87.199,97.165 88.141,98.107 88.634,98.107 89.725,99.197 v1(89.725,100.49) ; CB5.1 94.753,63.615 v1(95.841,64.704)
  Bottom Layer w0.2: v1(89.725,100.49) 93.904,100.49 95.879,98.515 v1@95.879,65.001
NetCB6_1: CB6.1 P1.2 | length 3.2
  Top Layer w0.508: P1.2 55.201,58.401 CB6.1
NetCB7_1: CB7.1 P1.34 | length 3.8
  Top Layer w0.2: P1.34 52.098,99.075 55.561,99.075 CB7.1@55.732,99.246
NetD1_1: D1.1 L1.2 U2.1 | length 10.1
  Top Layer w0.2: U2.1 105.363,98.869 L1.2 105.545,102.502 D1.1
NetJP1_2: JP1.2 U4.3 | length 3
  Top Layer w0.2: JP1.2@104.649,57.23 104.709,57.29 U4.3
NetOsc1_1: Osc1.1 R3.1 | length 3.3
  Top Layer w0.2: Osc1.1@99.783,87.618 Osc1.1 100.628,88.384 101.53,88.384 R3.1
PWM: CB2.1 P1.28 | length 47.7
  Top Layer w0.2: P1.28 52.081,91.438 v1(65.221,91.438) ; v1(91.959,102.4) 92.687,101.673 CB2.1
  Bottom Layer w0.2: v1(65.221,91.438) 65.221,93.624 74.91,103.313 91.046,103.313 v1(91.959,102.4)
R2_TFT: J1.7 U5.81 | length 28.5
  Top Layer w0.2: v1@74.844,73.9 76.116,72.627 J1.7 ; v1@76.33,92.201 78.225,94.095 78.225,95.134 U5.81
  Bottom Layer w0.2: v1(74.746,73.802) 74.746,74.634 77.476,77.363 77.476,90.523 76.456,91.544 76.456,91.976 76.596,92.116 v1(76.414,92.116)
R3_TFT: J1.8 U5.80 | length 27.5
  Top Layer w0.2: v1@75.847,74.152 76.616,73.383 J1.8 ; v1(77.51,92.116) 77.572,92.116 78.621,93.165 78.621,95.303 U5.80
  Bottom Layer w0.2: v1(75.843,74.147) 75.843,75.052 77.872,77.082 77.872,90.702 77.51,91.064 v1(77.51,92.116)
R4_TFT: J1.9 U5.79 | length 27.1
  Top Layer w0.2: v1(76.818,74.722) 76.818,73.869 77.116,73.571 J1.9 ; U5.79 79.017,95.473 79.017,92.41 78.606,91.999 v1(78.606,91.964)
  Bottom Layer w0.2: v1(76.818,74.722) 76.818,75.424 78.268,76.874 78.268,90.602 78.606,90.941 v1(78.606,91.964)
R5_TFT: J1.10 U5.78 | length 28.5
  Top Layer w0.2: J1.10 77.616,76.288 v1(79.014,77.686) ; U5.78 79.413,95.643 79.413,91.541 79.022,91.151 v1(79.022,90.302)
  Bottom Layer w0.2: v1@79.022,77.686 79.022,77.362 79.014,77.37 v1(79.014,77.686) 79.884,78.556 79.884,87.69 79.022,88.552 v1(79.022,90.302)
R6_TFT: J1.11 U5.77 | length 27.8
  Top Layer w0.2: J1.11 78.116,75.667 v1(78.612,76.164) ; U5.77 79.809,95.812 79.809,89.576 v1(79.871,89.513)
  Bottom Layer w0.2: v1(78.612,76.164) 80.28,77.831 80.28,88.319 79.871,88.728 v1(79.871,89.513)
R7_TFT: J1.12 U5.76 | length 28.9
  Top Layer w0.2: J1.12 78.616,74.753 v1(78.931,75.068) ; U5.76 80.205,95.982 80.205,91.186 81.259,90.131 v1(81.259,89.094)
  Bottom Layer w0.2: v1(78.931,75.068) 80.69,76.827 80.69,88.524 v1(81.259,89.094) 81.052,89.094 v1@81.155,88.99
RST: P1.23 U5.127 | length 45
  Top Layer w0.2: P1.23 50.811,87.628 v1@64.72,87.628 ; v1(71.181,76.004) 71.181,76.001 76.22,76.001 U5.127
  Bottom Layer w0.2: v1(64.72,87.691) 64.725,87.686 64.725,78.592 67.317,76 71.181,76 v1(71.181,76.004)
SPI_MISO: P1.25 U3.12 U4.2 | length 93.1
  Top Layer w0.2: P1.25 50.784,90.141 v1(60.133,90.141) ; U4.2 109.03,58.56 110.055,59.584 U3.12
  Bottom Layer w0.2: v1(60.133,90.141) 60.125,90.133 60.125,69.358 69.325,60.158 v1(110.04,60.158)
SPI_MOSI: P1.27 U3.14 U4.5 | length 101.1
  Top Layer w0.2: P1.27 50.776,92.673 v1(59.348,92.673) ; U3.14 111.325,60.747 111.214,60.636 v1(111.214,59.213) 111.214,57.327 112.521,56.02 U4.5
  Bottom Layer w0.2: v1(59.348,92.673) 59.348,69.026 69.161,59.213 v1(111.214,59.213)
SPI_SCK: P1.29 U3.16 U4.6 | length 100.3
  Top Layer w0.2: U3.16 112.595,61.953 113.276,61.272 v1(113.276,57.428) ; v1@113.332,57.29 U4.6
  Bottom Layer w0.2: P1.29 50.845,92.64 55.164,92.64 57.734,90.07 57.734,68.357 68.76,57.331 113.179,57.331 v1(113.276,57.428)
SSD_PWM: CB1.1 U5.51 | length 5
  Top Layer w0.2: U5.51 87.482,96.875 87.482,96.881 U5.51@87.595,96.994 ; U5.51@87.595,96.995 88.225,97.625 88.783,97.625 CB1.1
T_CS: P1.31 U3.15 | length 98.3
  Top Layer w0.2: v1(111.96,58.077) U3.15
  Bottom Layer w0.2: P1.31 50.823,95.202 55.676,95.202 58.61,92.267 58.61,68.72 69.253,58.077 v1(111.96,58.077)
T_PEN: P1.26 U3.11 | length 83
  Top Layer w0.2: P1.26 52.079,88.866 v1(60.871,88.866) ; v1(108.761,61.032) 109.42,61.691 U3.11
  Bottom Layer w0.2: v1(60.871,88.866) 60.871,69.656 69.496,61.032 v1(108.761,61.032)
VLED+: C1.1 D1.2 D2.2 J1.2 | length 93.7
  Top Layer w0.254: v1(70.64,68.721) 73.071,68.721 73.616,69.266 J1.2 ; v1(109.269,102.825) D1.2 114.831,102.825 D2.2@114.925,102.732 ; C1.1 D2.2@114.925,102.732 ; D2.2 D2.2@114.925,102.732
  Bottom Layer w0.254: v1@70.637,68.718 62.748,76.607 62.748,93.151 74.057,104.461 104.753,104.461 106.389,102.825 v1(109.269,102.825)
VLED-: J1.1 R1.2 R2.2 | length 74.3
  Top Layer w0.254: v1(71.775,71.078) 73.052,71.078 J1.1 ; R1.2 R2.2 v1(101.395,100.15)
  Bottom Layer w0.254: v1(71.775,71.078) 70.31,71.078 63.765,77.624 63.765,93.138 74.505,103.878 93.141,103.878 96.869,100.15 v1(101.395,100.15)
VSYNC: J1.33 U5.43 | length 27.4
  Top Layer w0.2: J1.33 89.125,71.023 89.125,73.271 89.457,73.603 v1(89.457,74.211) ; U5.43 90.862,95.733 v1(90.862,95.895)
  Bottom Layer w0.2: v1(89.457,74.211) 90.862,75.616 90.862,77.207 v1(90.862,95.895)
X+: J1.39 U3.2 | length 26.6
  Top Layer w0.2: J1.39 92.116,68.07 93.934,66.252 94.768,66.252 94.77,66.253 97.306,66.253 v1(97.307,66.252) ; U3.2 112.04,69.371 112.04,66.678 v1(112.026,66.664)
  Bottom Layer w0.2: v1(97.307,66.252) 111.613,66.252 v1(112.026,66.664)
X-: J1.37 U3.4 | length 29.3
  Top Layer w0.2: J1.37 91.116,74.804 92.527,76.215 96.801,76.215 97.512,75.504 97.512,73.191 v1(97.496,73.176) ; v1(107.861,72.586) 109.607,72.586 110.69,71.503 U3.4
  Bottom Layer w0.2: v1(97.496,73.176) 98.086,72.586 v1(107.861,72.586)
Y+: J1.40 U3.3 | length 23.5
  Top Layer w0.2: J1.40 92.616,68.554 93.227,67.943 v1(97.209,67.943) ; v1(111.294,67.568) 111.294,69.33 111.249,69.375 U3.3
  Bottom Layer w0.2: v1(97.209,67.943) 98.088,67.943 98.463,67.568 v1(111.294,67.568)
Y-: J1.38 U3.5 | length 27.9
  Top Layer w0.2: J1.38 91.616,74.619 92.816,75.819 96.238,75.819 96.625,75.432 v1(96.625,72.211) ; v1(106.665,71.746) 109.154,71.746 110.055,70.845 U3.5
  Bottom Layer w0.2: v1(96.625,72.211) 97.09,71.746 v1(106.665,71.746)
pads on no net: J1.35 U3.7 U3.8 U3.13 U5.24 U5.28 U5.29 U5.30 U5.31 U5.36 U5.37 U5.50 U5.53 U5.85 U5.86 U5.87 U5.88 U5.89 U5.90 U5.91 U5.92 U5.98 U5.99

## Polygon pours and split planes (outlines as drawn)
GND on Top Layer "gnd" (solid, remove dead copper, pour order 5): 47.116,53.136 cw(c47.111,53.199) 47.047,53.199 47.047,101.401 cw(c47.111,101.401) 47.124,101.464 cw(c47.136,101.401) 47.136,101.465 66.848,101.465 66.848,109.35 cw(c66.912,109.35) 66.848,109.352 cw(c66.912,109.354) 66.912,109.418 122.633,109.418 cw(c122.633,109.354) 122.697,109.354 122.697,53.199 cw(c122.633,53.199) 122.633,53.136 47.121,53.136 cw(c47.121,53.199)
GND on Bottom Layer "gnd" (solid, remove dead copper, pour order 6): 47.116,53.136 cw(c47.111,53.199) 47.047,53.199 47.047,101.401 cw(c47.111,101.401) 47.124,101.464 cw(c47.136,101.401) 47.136,101.465 66.848,101.465 66.848,109.35 cw(c66.912,109.35) 66.848,109.352 cw(c66.912,109.354) 66.912,109.418 122.633,109.418 cw(c122.633,109.354) 122.697,109.354 122.697,53.199 cw(c122.633,53.199) 122.633,53.136 47.121,53.136 cw(c47.121,53.199)

## Keep-outs
Keep-Out Layer:
  lines w0.127: 47.111,53.199 47.111,101.401 ; 47.121,53.199 53.899,53.199 77.863,53.199 122.633,53.199 122.633,106.192 122.633,109.354 70.227,109.354 66.912,109.354 ; 47.136,101.401 60.219,101.401 66.9,101.401 66.912,101.413 66.912,101.796 66.912,108.908 66.912,109.35 ; 68.901,108.566 120.39,108.566 cw(c120.39,107.296) 121.66,107.296 cw(c120.517,107.296) 120.517,106.153 69.02,106.153 ; 69.056,108.565 ccw(c69.056,107.422) 67.913,107.422 ccw(c69.183,107.422) 69.183,106.152

## Other copper
Top Layer:
  rectangle net +1.2: 108.806,82.592 120.95,85.248
  rectangle net +3.3: 108.843,74.6 112.84,81.978
Bottom Layer:
  rectangle net +1.2: 108.806,82.592 120.95,85.248
  rectangle net +3.3: 108.843,74.6 112.84,81.978

## Silkscreen, mask and mechanical layers (free items; w line width, h text height)
Top Overlay:
  circle w0.5: c52.116,54.746 r0.247
  rectangle: 48.516,53.746 49.316,56.746
  rectangle: 50.616,53.746 51.416,56.746
  region: 50.633,53.728 51.263,54.22 49.317,56.711 48.687,56.218
  rectangle: 52.766,53.746 53.566,55.346
  region: 52.166,55.946 52.166,56.746 50.616,56.746 50.616,55.946
  lines w0.8: 52.166,56.346 cw(c52.166,55.346) 53.166,55.346

## Text inside footprints (layer, text, board x,y; h text height)
P1: Bottom Overlay "1" at 49.016,55.353 h0.76 r270; Bottom Overlay "2" at 51.556,55.353 h0.76 r270